# Altium PCB Inverter - Copy.PcbDoc (part 2 of 2)
Units mm, origin at the board's own origin, x right, y up, seen from the top; angles counter-clockwise.
Board outline 150 x 100 mm, 2 copper layers (Top Layer, Bottom Layer), stack 1.74 mm thick; 289 components, 202 nets, 1845 pads, 676 vias.
Unrouted connection lines stored in the file: 683.
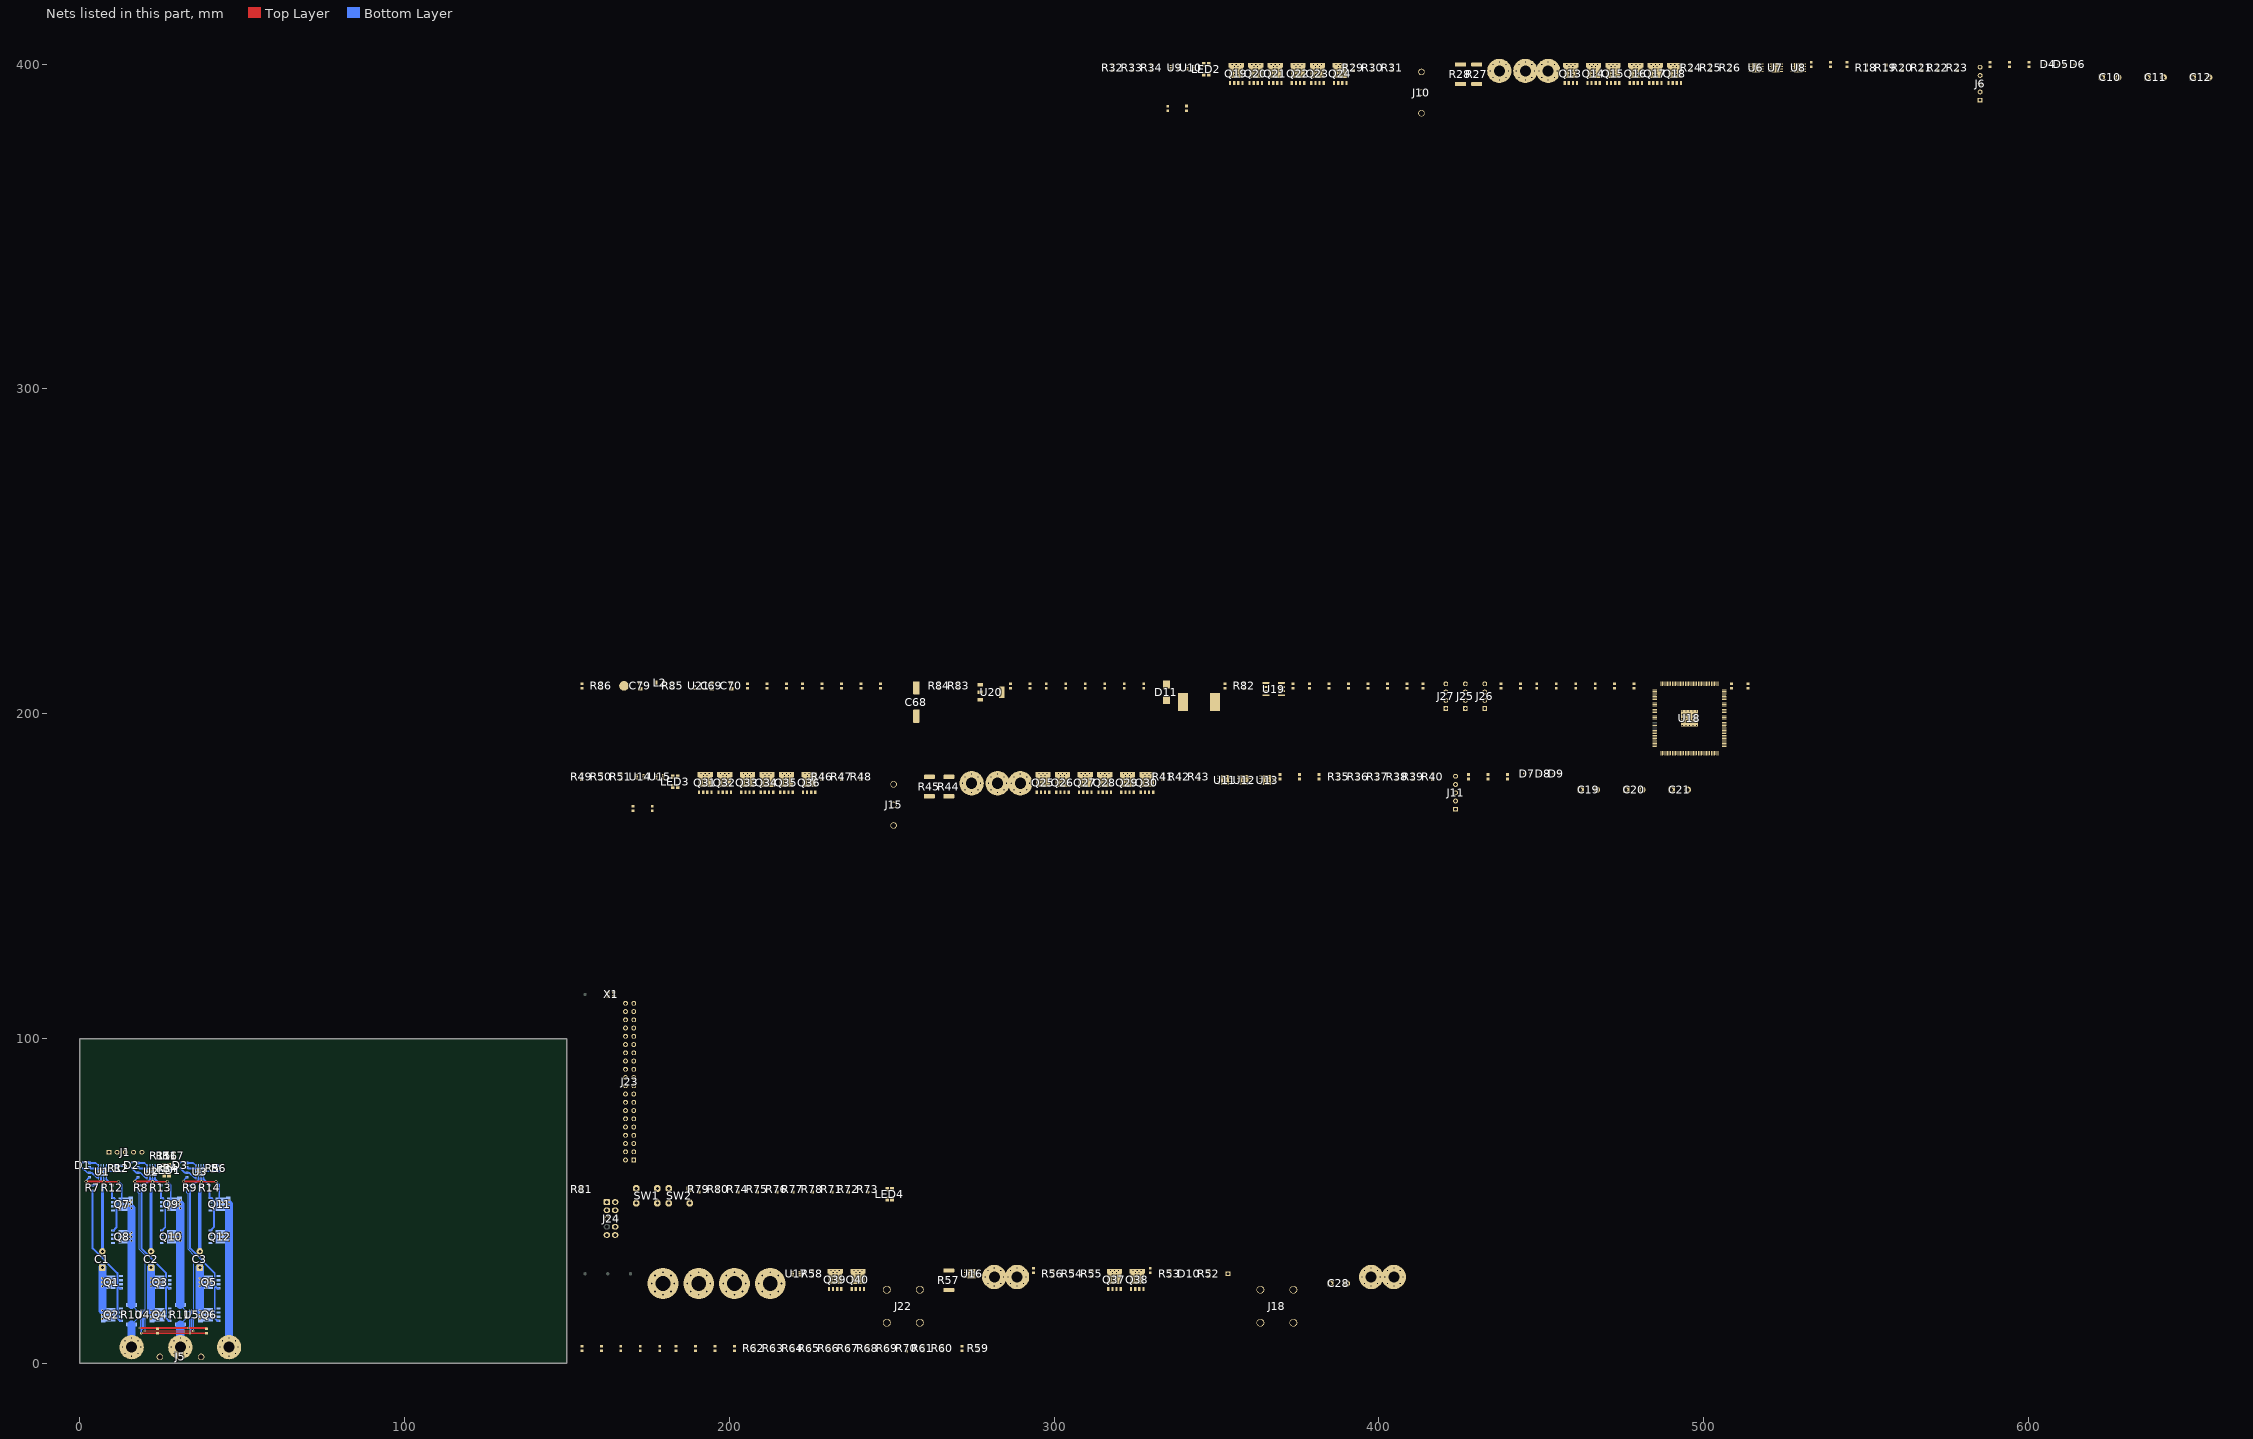
[diagram p2: the nets of this part, all layers, seen from the top]

## Part data
C1 C2 C3 C10 C11 C12 C19 C20 C21 C28: "CAP, ALU ELEC, 680UF, 35V, RAD"
C4 C5 C6 C7 C8 C9 C13 C14 C15 C16 C17 C18 C22 C23 C24 C25 C26 C27 C29 C30 C31 C41 C51 C52 C53 C54 C55 C56 C57 C58 C60 C61 C80: "CAP, MLCC, X5R, 1UF, 16V, 0603"
C32 C33 C34 C35 C36 C37 C38 C39 C40: "CAP, MLCC, C0G/NP0, 220PF, 50V, 0603"
C42 C43 C44 C45 C46 C47 C48 C49 C50 C62 C63 C64 C65 C66 C67 C71 C72 C73 C74 C75 C76 C77 C78 C81 C82 C83 C84 C85 C86: "CAP, MLCC, X7R, 100NF, 16V, 0603"
C59: "CAP, MLCC, X7R, 470PF, 50V, 0603"
C68: "CAP, ALU ELEC, 470UF, 16V, SMD"
C69 C70 C79: "CAP, MLCC, Y5V, 10UF, 0805"
D1 D2 D3 D4 D5 D6 D7 D8 D9 D10: "DIODE, SCHOTTKY, 200MA, 30V"
D11: "DIODE, SCHOTTK, RECTIF, 1A, 30V, SMB"
FID1 FID2 FID3 FID4: "1mm Fiducial with 2mm soldermask, 3mm keepout"
J1 J6 J11: "Header, 5-Pin"
J2 J3 J4 J7 J8 J9 J12 J13 J14 J16 J17 J20 J21: library part "M3 Spade Terminal", "M3 Spade Terminal"
J5 J10 J15: "TERMINAL BLOCK, WIRE TO BRD, 3POS, 10AWG"
J18 J22: "TERMINAL BLOCK, WIRE TO BRD, 2POS, 6AWG"
J23: "Header, 20-Pin, Dual row"
J24: library part CONN_HEADER_2x5P_0.100in_Male, "Header THD 10 POS Double-row 2.54mm pitch"
J25 J26 J27: "Header, 4-Pin"
L1: "INDUCTOR, 220µH, 20%, 2PINS"
L2: "FERRITE BEAD, 0.1OHM, 2A, 0805"
LED1 LED2 LED3 LED4: library part ASMB-MTB1-0A3A2, "LED, HB, RGB, 0.09W, PLCC-4"
MH1 MH2 MH3 MH4: library part MH_M4, "M4 Mounting Hole"
Q1 Q2 Q3 Q4 Q5 Q6 Q7 Q8 Q9 Q10 Q11 Q12 Q13 Q14 Q15 Q16 Q17 Q18 Q19 Q20 Q21 Q22 Q23 Q24 Q25 Q26 Q27 Q28 Q29 Q30 Q31 Q32 Q33 Q34 Q35 Q36 Q37 Q38 Q39 Q40: "MOSFET, N CH, 30V, 70A, SO-8 FL"
R1 R2 R3 R4 R5 R6 R18 R19 R20 R21 R22 R23 R35 R36 R37 R38 R39 R40 R54 R55 R83: "RESISTOR, 0603, 3K, 1%, ANTI SULFUR"
R7 R8 R9 R12 R13 R14 R24 R25 R26 R29 R30 R31 R41 R42 R43 R46 R47 R48 R56 R58 R59: "RES, THICK FILM, 1OHM, 1%, 0.1W"
R10 R11 R27 R28 R44 R45 R57: "RESISTOR, R0005, 2.0W, 1%"
R15 R16 R17 R32 R33 R34 R49 R50 R51 R62 R63 R64 R65 R66 R67 R68 R69 R70 R71 R72 R73: "RES, THICK FILM, 330 OHM, 1%, 0.1W"
R52 R60 R74 R75 R76 R79 R80 R85 R86: "Resistor, 10k, 0603"
R53 R61 R77 R78 R81 R84: "RESISTOR, CERAMIC, 1K, 0.1W, 1%"
R82: "RESISTOR, 0603, 0.1W, 1%, 0R33"
SP1: library part GroundStarPoint, "Wide star point meant for joining ground planes"
SW1 SW2: "SWITCH, SPNO, 0.05A"
U1 U2 U3 U6 U7 U8 U11 U12 U13 U16: "DRIVER, MOSFET, HALF BRIDGE, WSON-8, 1A"
U4 U5 U9 U10 U14 U15 U17: "CURRENT SENSE AMP, 50V/V, 80KHZ"
U19: "DC-DC CONV, BOOST/BUCK/INVERTING, SOIC-8"
U20: "IC, LDO, REG, 3.3V, SOT223"
U21: "LDO, FIXED, 12V, 0.1A, SOT-23-5"
X1: "OSCILLATOR, SPXO, SG-210STF, 50 MHZ, SMD"

## Via types
v1: diameter 0.7, hole 0.3, Top Layer to Bottom Layer, 525 vias
v2: diameter 0.7, hole 0.35, Top Layer to Bottom Layer, 110 vias
v3: diameter 1.27, hole 0.5, Top Layer to Bottom Layer, 32 vias
v4: diameter 1, hole 0.6, Top Layer to Bottom Layer, 9 vias

## Nets (pads, with @x,y where several pads share a name; then routed paths per layer and width w, separated by ;. In a path a pad name is that pad's centre, name@x,y a point inside that pad or via, vN(x,y) a via of type N, cw(c..) or ccw(c..) an arc to the next point about the centre after c; other vN are vias at no path point)
1.65VREF: R85.1 R86.2 U4.1 U5.1 U9.1 U10.1 U14.1 U15.1 U17.1 | length 22.9
  Top Layer w0.254: v2(20,10) v2(35,10)
  Bottom Layer w0.254: v2(20,10) 20.15,10.15 U4.1@20.15,13.875 ; v2(35,10) 35.15,10.15 U5.1@35.15,13.875
5V: C68.1 J1.1 J6.1 J11.1 J25.1 J25.2 J25.3 J25.4 L1.1 R83.1 U20.3
12V: C7.2 C8.2 C9.2 C16.2 C17.2 C18.2 C25.2 C26.2 C27.2 C30.2 C80.2 D1.A D2.A D3.A D4.A D5.A D6.A D7.A D8.A D9.A D10.A U1.1 U2.1 U3.1 U6.1 U7.1 U8.1 U11.1 U12.1 U13.1 U16.1 U21.5 | length 15.6
  Bottom Layer w0.5: D1.A@1,61.9 2.8,61.9 C7.2@3,61.7 4.995,61.7 U1.1@5.8,60.895 ; D2.A@16,61.9 17.8,61.9 C8.2@18,61.7 19.995,61.7 U2.1@20.8,60.895 ; D3.A@31,61.9 32.8,61.9 C9.2@33,61.7 34.995,61.7 U3.1@35.8,60.895
AGND: C31.1 C32.1 C33.1 C34.1 C35.1 C36.1 C37.1 C38.1 C39.1 C40.1 C41.1 C42.1 C60.1 C61.1 C62.1 C63.1 C64.1 C65.1 C66.1 C67.1 C79.1 C81.1 C82.1 C83.1 C84.1 C85.1 C86.1 R53.1 R61.1 R86.1 SP1.2 U4.2 U5.2 U9.2 U10.2 U14.2 U15.2 U17.2 U18.4 | length 29.6
  Top Layer w0.5: v2@19,9.248 24,9.248 C82.1@39,9.248
  Bottom Layer w0.5: v2(19,9.3) 19,10.336 19.5,10.836 U4.2@19.5,13.875 ; v2(34,9.3) 34,10.336 34.5,10.836 U5.2@34.5,13.875
AUX_+: J20.1 J22.1 R57.1 U17.5
  other v2: 281.6,23.8 279.62,24.62 283.58,24.62 278.8,26.6 284.4,26.6 279.62,28.58 283.58,28.58 281.6,29.4
AUX_I: R69.1 U17.6
AUX_V: R52.1 R53.2 R70.1
AVCC: C41.2 C42.2 C60.2 C61.2 C62.2 C63.2 C64.2 C65.2 C66.2 C67.2 C79.2 C81.2 C82.2 C83.2 C84.2 C85.2 C86.2 L2.1 R59.2 U4.3 U5.3 U9.3 U10.3 U14.3 U15.3 U17.3 U18.2 U18.9 U18.34 U18.35 U18.71 U18.107 U18.143 | length 26.7
  Top Layer w0.5: v2(18.5,10.9) C82.2@39,10.9
  Bottom Layer w0.5: v2(18.5,10.9) 18.848,11.248 U4.3@18.848,13.875 ; v2(33.5,10.9) 33.848,11.248 U5.3@33.848,13.873
B_PWM_H: R54.2 U16.2
B_PWM_L: R55.2 U16.3
BOOT_SEL: J23.40 U18.126
CLK_50: U18.27 X1.3
CONF_DONE: R79.1 U18.138
CRC_ERROR: R72.2 U18.134
DCBUS: C1.1 C2.1 C3.1 C10.1 C11.1 C12.1 C19.1 C20.1 C21.1 C28.1 J16.1 J18.2 Q1.D Q2.D Q3.D Q4.D Q5.D Q6.D Q13.D Q14.D Q15.D Q16.D Q17.D Q18.D Q25.D Q26.D Q27.D Q28.D Q29.D Q30.D Q37.D Q38.D R60.2 R82.2 U19.6 U21.4 | length 39.7
  Bottom Layer w2.54: v1(7,16.25) v1(7,23.75) v1(7,25) v1(7,26.25) C1.1@7,29.5 ; v1(22,16.25) v1(22,23.75) v1(22,25) v1(22,26.25) C2.1@22,29.5 ; v1(37,16.25) v1(37,23.75) v1(37,25) v1(37,26.25) C3.1@37,29.5
  other v1: 7,13.75 22,13.75 37,13.75 7.6,14.425 8.425,14.425 9.275,14.425 10.1,14.425 22.6,14.425 23.425,14.425 24.275,14.425 25.1,14.425 37.6,14.425 38.425,14.425 39.275,14.425 40.1,14.425 7,15 22,15 37,15 7.625,15.575 8.45,15.575 9.3,15.575 10.125,15.575 22.625,15.575 23.45,15.575 24.3,15.575 25.125,15.575 37.625,15.575 38.45,15.575 39.3,15.575 40.125,15.575 7.6,24.425 8.425,24.425 9.275,24.425 10.1,24.425 22.6,24.425 23.425,24.425 24.275,24.425 25.1,24.425 37.6,24.425 38.425,24.425 39.275,24.425 40.1,24.425 318.025,25.475 325.025,25.475 319.175,25.5 326.175,25.5 7.625,25.575 8.45,25.575 9.3,25.575 10.125,25.575 22.625,25.575 23.45,25.575 24.3,25.575 25.125,25.575 37.625,25.575 38.45,25.575 39.3,25.575 40.125,25.575 318.025,26.3 325.025,26.3 319.175,26.325 326.175,26.325 318.025,27.15 325.025,27.15 319.175,27.175 326.175,27.175 318.025,27.975 325.025,27.975 319.175,28 326.175,28 317.35,28.6 318.6,28.6 319.85,28.6 324.35,28.6 325.6,28.6 326.85,28.6 296.025,178.475 302.025,178.475 309.025,178.475 315.025,178.475 322.025,178.475 328.025,178.475 297.175,178.5 303.175,178.5 310.175,178.5 316.175,178.5 323.175,178.5 329.175,178.5 296.025,179.3 302.025,179.3 309.025,179.3 315.025,179.3 322.025,179.3 328.025,179.3 297.175,179.325 303.175,179.325 310.175,179.325 316.175,179.325 323.175,179.325 329.175,179.325 296.025,180.15 302.025,180.15 309.025,180.15 315.025,180.15 322.025,180.15 328.025,180.15 297.175,180.175 303.175,180.175 310.175,180.175 316.175,180.175 323.175,180.175 329.175,180.175 296.025,180.975 302.025,180.975 309.025,180.975 315.025,180.975 322.025,180.975 328.025,180.975 297.175,181 303.175,181 310.175,181 316.175,181 323.175,181 329.175,181 295.35,181.6 296.6,181.6 297.85,181.6 301.35,181.6 302.6,181.6 303.85,181.6 308.35,181.6 309.6,181.6 310.85,181.6 314.35,181.6 315.6,181.6 316.85,181.6 321.35,181.6 322.6,181.6 323.85,181.6 327.35,181.6 328.6,181.6 329.85,181.6 458.525,396.775 465.525,396.775 471.525,396.775 478.525,396.775 484.525,396.775 490.525,396.775 459.675,396.8 466.675,396.8 472.675,396.8 479.675,396.8 485.675,396.8 491.675,396.8 458.525,397.6 465.525,397.6 471.525,397.6 478.525,397.6 484.525,397.6 490.525,397.6 459.675,397.625 466.675,397.625 472.675,397.625 479.675,397.625 485.675,397.625 491.675,397.625 458.525,398.45 465.525,398.45 471.525,398.45 478.525,398.45 484.525,398.45 490.525,398.45 459.675,398.475 466.675,398.475 472.675,398.475 479.675,398.475 485.675,398.475 491.675,398.475 458.525,399.275 465.525,399.275 471.525,399.275 478.525,399.275 484.525,399.275 490.525,399.275 459.675,399.3 466.675,399.3 472.675,399.3 479.675,399.3 485.675,399.3 491.675,399.3 457.85,399.9 459.1,399.9 460.35,399.9 464.85,399.9 466.1,399.9 467.35,399.9 470.85,399.9 472.1,399.9 473.35,399.9 477.85,399.9 479.1,399.9 480.35,399.9 483.85,399.9 485.1,399.9 486.35,399.9 489.85,399.9 491.1,399.9 492.35,399.9
  other v2: 397.6,23.8 395.62,24.62 399.58,24.62 394.8,26.6 400.4,26.6 395.62,28.58 399.58,28.58 397.6,29.4
DEV_OE: J23.39 U18.122
GND: C1.2 C2.2 C3.2 C7.1 C8.1 C9.1 C10.2 C11.2 C12.2 C16.1 C17.1 C18.1 C19.2 C20.2 C21.2 C25.1 C26.1 C27.1 C28.2 C30.1 C43.1 C44.1 C45.1 C46.1 C47.1 C48.1 C49.1 C50.1 C51.1 C52.1 C53.1 C54.1 C55.1 C56.1 C57.1 C58.1 C59.1 C68.2 C69.1 C70.1 C71.1 C72.1 C73.1 C74.1 C75.1 C76.1 C77.1 C78.1 C80.1 D11.A J1.5 J6.5 J11.5 J17.1 J18.1 J21.1 J22.2 J24.2 J24.10 J27.1 J27.2 J27.3 J27.4 MH1.1 MH2.1 MH3.1 MH4.1 Q7.S Q8.S Q9.S Q10.S Q11.S Q12.S Q19.S Q20.S Q21.S Q22.S Q23.S Q24.S Q31.S Q32.S Q33.S Q34.S Q35.S Q36.S Q39.S Q40.S R1.1 R2.1 R3.1 R4.1 R5.1 R6.1 R18.1 R19.1 R20.1 R21.1 R22.1 R23.1 R35.1 R36.1 R37.1 R38.1 R39.1 R40.1 R54.1 R55.1 R81.1 R84.1 SP1.1 SW1.1 SW2.1 U1.4 U1.9 U2.4 U2.9 U3.4 U3.9 U6.4 U6.9 U7.4 U7.9 U8.4 U8.9 U11.4 U11.9 U12.4 U12.9 U13.4 U13.9 U16.4 U16.9 U18.42 U18.53 U18.63 U18.68 U18.83 U18.95 U18.104 U18.116 U18.125 U18.133 U18.137 U18.142 U18.145 U19.4 U20.1 U21.2 X1.2 | length 91.6
  Bottom Layer w0.5: C7.1@3,60.3 3.3,60 5.5,60 v1(6,59.5) ; U1.9@7,59 7.15,59.15 R1.1@11,59.15 R2.1@13,59.15 ; v1(8,59.5) 8.2,59.7 U1.4@8.2,60.895 ; C8.1@18,60.3 18.3,60 20.5,60 v1(21,59.5) ; U2.9@22.15,59.15 R3.1@26,59.15 R4.1@28,59.15 ; U2.9@23.2,59.7 U2.4@23.2,60.895 ; C9.1@33,60.3 33.3,60 35.5,60 v1(36,59.5) ; U3.9@37.15,59.15 R5.1@41,59.15 R6.1@43,59.15 ; U3.9@38.2,59.7 U3.4@38.2,60.895
  Bottom Layer w1: C1.2@7,34.5 7,54.5 ; C2.2@22,34.5 22,54.5 ; C3.2@37,34.5 37,54.5
  other v1: 274.1,26.6 275.1,26.6 274.1,27.6 275.1,27.6 274.1,28.6 275.1,28.6 6,58.5 7,58.5 8,58.5 21,58.5 22,58.5 23,58.5 36,58.5 37,58.5 38,58.5 7,59.5 22,59.5 23,59.5 37,59.5 38,59.5 352.1,178.6 353.1,178.6 358.1,178.6 359.1,178.6 365.1,178.6 366.1,178.6 352.1,179.6 353.1,179.6 358.1,179.6 359.1,179.6 365.1,179.6 366.1,179.6 352.1,180.6 353.1,180.6 358.1,180.6 359.1,180.6 365.1,180.6 366.1,180.6 493.4,196.4 494.5,196.4 495.6,196.4 496.7,196.4 497.8,196.4 493.4,197.5 494.5,197.5 495.6,197.5 496.7,197.5 497.8,197.5 493.4,198.6 494.5,198.6 495.6,198.6 496.7,198.6 497.8,198.6 493.4,199.7 494.5,199.7 495.6,199.7 496.7,199.7 497.8,199.7 493.4,200.8 494.5,200.8 495.6,200.8 496.7,200.8 497.8,200.8 515.6,397.9 516.6,397.9 521.6,397.9 522.6,397.9 528.6,397.9 529.6,397.9 515.6,398.9 516.6,398.9 521.6,398.9 522.6,398.9 528.6,398.9 529.6,398.9 515.6,399.9 516.6,399.9 521.6,399.9 522.6,399.9 528.6,399.9 529.6,399.9
  other v2: 288.6,23.8 404.6,23.8 286.62,24.62 290.58,24.62 402.62,24.62 406.58,24.62 285.8,26.6 291.4,26.6 401.8,26.6 407.4,26.6 286.62,28.58 290.58,28.58 402.62,28.58 406.58,28.58 288.6,29.4 404.6,29.4
  other v3: 179.6,21.1 190.6,21.1 201.6,21.1 212.6,21.1 177.125,22.125 182.075,22.125 188.125,22.125 193.075,22.125 199.125,22.125 204.075,22.125 210.125,22.125 215.075,22.125 176.1,24.6 183.1,24.6 187.1,24.6 194.1,24.6 198.1,24.6 205.1,24.6 209.1,24.6 216.1,24.6 177.125,27.075 182.075,27.075 188.125,27.075 193.075,27.075 199.125,27.075 204.075,27.075 210.125,27.075 215.075,27.075 179.6,28.1 190.6,28.1 201.6,28.1 212.6,28.1
GPIO1: J23.1 U18.75
GPIO2: J23.2 U18.74
GPIO3: J23.3 U18.77
GPIO4: J23.4 U18.76
GPIO5: J23.5 U18.79
GPIO6: J23.6 U18.78
GPIO7: J23.7 U18.81
GPIO8: J23.8 U18.85
GPIO9: J23.9 U18.84
GPIO10: J23.10 U18.87
GPIO11: J23.11 U18.86
GPIO12: J23.12 U18.110
GPIO13: J23.13 U18.111
GPIO14: J23.14 U18.113
GPIO15: J23.15 U18.114
GPIO16: J23.16 U18.118
GPIO17: J23.17 U18.119
GPIO18: J23.18 U18.26
GPIO19: J23.19 U18.28
GPIO20: J23.20 U18.29
GPIO21: J23.21 U18.88
GPIO22: J23.22 U18.89
GPIO23: J23.23 U18.90
GPIO24: J23.24 U18.91
GPIO25: J23.25 U18.96
GPIO26: J23.26 U18.98
GPIO27: J23.27 U18.17
GPIO28: J23.28 U18.30
GPIO29: J23.29 U18.48
GPIO30: J23.30 U18.61
GPIO31: J23.31 U18.80
GPIO32: J23.32 U18.97
GPIO33: J23.33 U18.112
GPIO34: J23.34 U18.123
GPIO35: J23.35 U18.32
GPIO36: J23.36 U18.33
GPIO37: J23.37 U18.105
GPIO38: J23.38 U18.106
JTAGEN: J24.8 R76.1 U18.15
M0_ENC_A: J1.2 U18.124
M0_ENC_B: J1.3 U18.127
M0_ENC_Z: J1.4 U18.130
M0_IA: R63.1 U4.6 U9.6 | length 40.3
  Bottom Layer w0.254: 18,55.5 18,52.573 18.373,52.2 18.373,35.119 20.15,33.342 U4.6@20.15,16.125
M0_IB: R64.1 U5.6 | length 40.3
  Bottom Layer w0.254: 33,55.5 33,52.573 33.373,52.2 33.373,35.119 35.15,33.342 U5.6@35.15,16.125
M0_LEDB: R17.2 U18.50
M0_LEDG: R16.2 U18.47
M0_LEDR: R15.2 U18.46
M0_PH_A: J2.1 J5.1 R10.1 U4.5 | length 12.6
  Bottom Layer w0.254: R10.1@16,12 19.5,15.5 U4.5@19.5,16.125
  Bottom Layer w2.54: J2.1@16,5 v2(16,7.8) R10.1@16,12
  other v2: 16,2.2 14.02,3.02 17.98,3.02 13.2,5 18.8,5 14.02,6.98 17.98,6.98
M0_PH_B: J3.1 J5.2 R11.1 U5.5 | length 12.6
  Bottom Layer w0.254: R11.1@31,12 34.5,15.5 U5.5@34.5,16.125
  Bottom Layer w2.54: J3.1@31,5 v2(31,7.8) R11.1@31,12
  other v2: 31,2.2 29.02,3.02 32.98,3.02 28.2,5 33.8,5 29.02,6.98 32.98,6.98
M0_PH_C: C6.1 J4.1 J5.3 Q5.S Q6.S Q11.D Q12.D U3.6 | length 63.7
  Top Layer w0.5: v4(32,56) v4@37.4,56 ; v4(37.5,55.9) v4@41.9,55.9
  Bottom Layer w0.5: v4@32,56.3 C6.1@33,57.3 ; v4@37.45,55.95 U3.6@37.45,57.055 ; v4(42,56) 43,55 Q11.D@43,49
  Bottom Layer w2.54: J4.1@46,5 v1(46,37.75) v1(46,39) v1(46,40.25) v1(46,47.75) v1(46,49)
  other v1: 42.875,38.425 43.7,38.425 44.55,38.425 45.375,38.425 42.9,39.575 43.725,39.575 44.575,39.575 45.4,39.575 42.875,48.425 43.7,48.425 44.55,48.425 45.375,48.425 42.9,49.575 43.725,49.575 44.575,49.575 45.4,49.575 46,50.25
  other v2: 46,2.2 44.02,3.02 47.98,3.02 43.2,5 48.8,5 44.02,6.98 47.98,6.98 46,7.8
M0_PWM_AH: R1.2 U1.2 U18.38
M0_PWM_AL: R2.2 U1.3 U18.39
M0_PWM_BH: R3.2 U2.2 U18.41
M0_PWM_BL: R4.2 U2.3 U18.43
M0_PWM_CH: R5.2 U3.2 U18.44
M0_PWM_CL: R6.2 U3.3 U18.45
M1_ENC_A: J6.2 U18.131
M1_ENC_B: J6.3 U18.132
M1_ENC_Z: J6.4 U18.135
M1_IA: R65.1
M1_IB: R66.1 U10.6
M1_LEDB: R34.2 U18.65
M1_LEDG: R33.2 U18.64
M1_LEDR: R32.2 U18.62
M1_PH_A: J7.1 J10.1 R27.1 U9.5
  other v2: 437.1,395.1 435.12,395.92 439.08,395.92 434.3,397.9 439.9,397.9 435.12,399.88 439.08,399.88 437.1,400.7
M1_PH_B: J8.1 J10.2 R28.1 U10.5
  other v2: 445.1,395.1 443.12,395.92 447.08,395.92 442.3,397.9 447.9,397.9 443.12,399.88 447.08,399.88 445.1,400.7
M1_PH_C: C15.1 J9.1 J10.3 Q17.S Q18.S Q23.D Q24.D U8.6
  other v1: 380.525,396.775 387.525,396.775 381.675,396.8 388.675,396.8 380.525,397.6 387.525,397.6 381.675,397.625 388.675,397.625 380.525,398.45 387.525,398.45 381.675,398.475 388.675,398.475 380.525,399.275 387.525,399.275 381.675,399.3 388.675,399.3 379.85,399.9 381.1,399.9 382.35,399.9 386.85,399.9 388.1,399.9 389.35,399.9
  other v2: 452.1,395.1 450.12,395.92 454.08,395.92 449.3,397.9 454.9,397.9 450.12,399.88 454.08,399.88 452.1,400.7
M1_PWM_AH: R18.2 U6.2 U18.52
M1_PWM_AL: R19.2 U6.3 U18.54
M1_PWM_BH: R20.2 U7.2 U18.55
M1_PWM_BL: R21.2 U7.3 U18.56
M1_PWM_CH: R22.2 U8.2 U18.57
M1_PWM_CL: R23.2 U8.3 U18.58
M2_ENC_A: J11.2 U18.140
M2_ENC_B: J11.3 U18.141
M2_ENC_Z: J11.4 U18.120
M2_IA: R67.1 U14.6
M2_IB: R68.1 U15.6
M2_LEDB: R51.2 U18.70
M2_LEDG: R50.2 U18.69
M2_LEDR: R49.2 U18.66
M2_PH_A: J12.1 J15.1 R44.1 U14.5
  other v2: 274.6,175.8 272.62,176.62 276.58,176.62 271.8,178.6 277.4,178.6 272.62,180.58 276.58,180.58 274.6,181.4
M2_PH_B: J13.1 J15.2 R45.1 U15.5
  other v2: 282.6,175.8 280.62,176.62 284.58,176.62 279.8,178.6 285.4,178.6 280.62,180.58 284.58,180.58 282.6,181.4
M2_PH_C: C24.1 J14.1 J15.3 Q29.S Q30.S Q35.D Q36.D U13.6
  other v1: 217.025,178.475 224.025,178.475 218.175,178.5 225.175,178.5 217.025,179.3 224.025,179.3 218.175,179.325 225.175,179.325 217.025,180.15 224.025,180.15 218.175,180.175 225.175,180.175 217.025,180.975 224.025,180.975 218.175,181 225.175,181 216.35,181.6 217.6,181.6 218.85,181.6 223.35,181.6 224.6,181.6 225.85,181.6
  other v2: 289.6,175.8 287.62,176.62 291.58,176.62 286.8,178.6 292.4,178.6 287.62,180.58 291.58,180.58 289.6,181.4
M2_PWM_AH: R35.2 U11.2 U18.92
M2_PWM_AL: R36.2 U11.3 U18.93
M2_PWM_BH: R37.2 U12.2 U18.99
M2_PWM_BL: R38.2 U12.3 U18.100
M2_PWM_CH: R39.2 U13.2 U18.101
M2_PWM_CL: R40.2 U13.3 U18.102
NCONFIG: R78.1 SW2.2 U18.129
NetC4_1: C4.1 Q1.S Q2.S Q7.D Q8.D R10.2 U1.6 U4.4 | length 53.7
  Top Layer w0.5: v4(2,56) v4@7.4,56 ; v4(7.5,55.9) 11.9,55.9 v4(12,56)
  Bottom Layer w0.254: R10.2@16,18 17.875,16.125 U4.4@18.85,16.125
  Bottom Layer w0.5: v4(2,56) 2,56.3 C4.1@3,57.3 ; U1.6@7.4,57.105 7.45,57.055 7.45,55.95 v4(7.5,55.9) ; v4(12,56) 13,55 Q7.D@13,49
  Bottom Layer w2.54: R10.2@16,18 v1(16,37.75) v1(16,39) v1(16,40.25) v1(16,47.75)
  other v1: 12.875,38.425 13.7,38.425 14.55,38.425 15.375,38.425 12.9,39.575 13.725,39.575 14.575,39.575 15.4,39.575 12.875,48.425 13.7,48.425 14.55,48.425 15.375,48.425 16,49 12.9,49.575 13.725,49.575 14.575,49.575 15.4,49.575 16,50.25
NetC4_2: C4.2 D1.K U1.8 | length 6
  Bottom Layer w0.5: D1.K@1,60.1 2.4,58.7 C4.2@3,58.7 3.75,58.7 5.345,57.105 U1.8@5.8,57.105
NetC5_1: C5.1 Q3.S Q4.S Q9.D Q10.D R11.2 U2.6 U5.4 | length 54.4
  Top Layer w0.5: v4(17,56) v4@22.4,56 ; v4(22.5,55.9) v4@26.9,55.9
  Bottom Layer w0.254: R11.2@31,18 32.875,16.125 U5.4@33.85,16.125
  Bottom Layer w0.5: v4@17,56.3 C5.1@18,57.3 ; v4@22.45,55.95 U2.6@22.45,57.055 ; v4(27,56) 28,55 Q9.D@28,49
  Bottom Layer w2.54: R11.2@31,18 v1(31,39) v1(31,40.25) v1(31,47.75) v1(31,49)
  other v1: 31,37.75 27.875,38.425 28.7,38.425 29.55,38.425 30.375,38.425 27.9,39.575 28.725,39.575 29.575,39.575 30.4,39.575 27.875,48.425 28.7,48.425 29.55,48.425 30.375,48.425 27.9,49.575 28.725,49.575 29.575,49.575 30.4,49.575 31,50.25
NetC5_2: C5.2 D2.K U2.8 | length 6
  Bottom Layer w0.5: D2.K@16,60.1 17.4,58.7 C5.2@18,58.7 18.75,58.7 20.345,57.105 U2.8@20.8,57.105
NetC6_2: C6.2 D3.K U3.8 | length 6
  Bottom Layer w0.5: D3.K@31,60.1 32.4,58.7 C6.2@33,58.7 33.75,58.7 35.345,57.105 U3.8@35.8,57.105
NetC13_1: C13.1 Q13.S Q14.S Q19.D Q20.D R27.2 U6.6 U9.4
  other v1: 355.525,396.775 361.525,396.775 356.675,396.8 362.675,396.8 355.525,397.6 361.525,397.6 356.675,397.625 362.675,397.625 355.525,398.45 361.525,398.45 356.675,398.475 362.675,398.475 355.525,399.275 361.525,399.275 356.675,399.3 362.675,399.3 354.85,399.9 356.1,399.9 357.35,399.9 360.85,399.9 362.1,399.9 363.35,399.9
NetC13_2: C13.2 D4.K U6.8
NetC14_1: C14.1 Q15.S Q16.S Q21.D Q22.D R28.2 U7.6 U10.4
  other v1: 367.525,396.775 374.525,396.775 368.675,396.8 375.675,396.8 367.525,397.6 374.525,397.6 368.675,397.625 375.675,397.625 367.525,398.45 374.525,398.45 368.675,398.475 375.675,398.475 367.525,399.275 374.525,399.275 368.675,399.3 375.675,399.3 366.85,399.9 368.1,399.9 369.35,399.9 373.85,399.9 375.1,399.9 376.35,399.9
NetC14_2: C14.2 D5.K U7.8
NetC15_2: C15.2 D6.K U8.8
NetC22_1: C22.1 Q25.S Q26.S Q31.D Q32.D R44.2 U11.6 U14.4
  other v1: 192.025,178.475 198.025,178.475 193.175,178.5 199.175,178.5 192.025,179.3 198.025,179.3 193.175,179.325 199.175,179.325 192.025,180.15 198.025,180.15 193.175,180.175 199.175,180.175 192.025,180.975 198.025,180.975 193.175,181 199.175,181 191.35,181.6 192.6,181.6 193.85,181.6 197.35,181.6 198.6,181.6 199.85,181.6
NetC22_2: C22.2 D7.K U11.8
NetC23_1: C23.1 Q27.S Q28.S Q33.D Q34.D R45.2 U12.6 U15.4
  other v1: 205.025,178.475 211.025,178.475 206.175,178.5 212.175,178.5 205.025,179.3 211.025,179.3 206.175,179.325 212.175,179.325 205.025,180.15 211.025,180.15 206.175,180.175 212.175,180.175 205.025,180.975 211.025,180.975 206.175,181 212.175,181 204.35,181.6 205.6,181.6 206.85,181.6 210.35,181.6 211.6,181.6 212.85,181.6
NetC23_2: C23.2 D8.K U12.8
NetC24_2: C24.2 D9.K U13.8
NetC29_1: C29.1 Q37.S Q38.S Q39.D Q40.D R57.2 U16.6 U17.4
  other v1: 232.025,25.475 239.025,25.475 233.175,25.5 240.175,25.5 232.025,26.3 239.025,26.3 233.175,26.325 240.175,26.325 232.025,27.15 239.025,27.15 233.175,27.175 240.175,27.175 232.025,27.975 239.025,27.975 233.175,28 240.175,28 231.35,28.6 232.6,28.6 233.85,28.6 238.35,28.6 239.6,28.6 240.85,28.6
NetC29_2: C29.2 D10.K U16.8
NetC31_2: C31.2 R59.1 U18.5
NetC32_2: C32.2 R62.2 U18.3
NetC33_2: C33.2 R63.2 U18.6
NetC34_2: C34.2 R64.2 U18.7
NetC35_2: C35.2 R65.2 U18.8
NetC36_2: C36.2 R66.2 U18.10
NetC37_2: C37.2 R67.2 U18.11
NetC38_2: C38.2 R68.2 U18.12
NetC39_2: C39.2 R69.2 U18.13
NetC40_2: C40.2 R70.2 U18.14
NetC59_2: C59.2 U19.3
NetD11_K: D11.K L1.2 U19.2
NetJ19_1: J19.1 R52.2
NetLED1_1: LED1.1 R15.1
NetLED1_2: LED1.2 R16.1
NetLED1_3: LED1.3 R17.1
NetLED2_1: LED2.1 R32.1
NetLED2_2: LED2.2 R33.1
NetLED2_3: LED2.3 R34.1
NetLED3_1: LED3.1 R49.1
NetLED3_2: LED3.2 R50.1
NetLED3_3: LED3.3 R51.1
NetLED4_1: LED4.1 R71.1
NetLED4_2: LED4.2 R72.1
NetLED4_3: LED4.3 R73.1
NetQ1_G: Q1.G Q2.G R7.1 | length 45.3
  Bottom Layer w0.6: R7.1@4,53.15 4,35.379 11.6,27.779 11.6,23.858 ; Q2.G@12.725,13.095 12.363,13.095 11.6,13.858 11.6,23.858 ; Q1.G@12.725,23.095 12.363,23.095 11.6,23.858
NetQ3_G: Q3.G Q4.G R8.1 | length 45.3
  Bottom Layer w0.6: R8.1@19,53.15 19,35.379 26.6,27.779 26.6,23.858 ; Q4.G@27.725,13.095 27.363,13.095 26.6,13.858 26.6,23.858 ; Q3.G@27.725,23.095 27.363,23.095 26.6,23.858
NetQ5_G: Q5.G Q6.G R9.1 | length 45.3
  Bottom Layer w0.6: R9.1@34,53.15 34,35.379 41.6,27.779 41.6,23.858 ; Q6.G@42.725,13.095 42.363,13.095 41.6,13.858 41.6,23.858 ; Q5.G@42.725,23.095 42.363,23.095 41.6,23.858
NetQ7_G: Q7.G Q8.G R12.1 | length 13.5
  Bottom Layer w0.6: R12.1@10,53.15 10,51.18 Q7.G@10.275,50.905 10.637,50.905 11.35,50.192 11.35,41.98 Q8.G@10.275,40.905
NetQ9_G: Q9.G Q10.G R13.1 | length 13.5
  Bottom Layer w0.6: R13.1@25,53.15 25,51.18 Q9.G@25.275,50.905 25.637,50.905 26.35,50.192 26.35,41.98 Q10.G@25.275,40.905
NetQ11_G: Q11.G Q12.G R14.1 | length 13.5
  Bottom Layer w0.6: R14.1@40,53.15 40,51.18 Q11.G@40.275,50.905 40.637,50.905 41.35,50.192 41.35,41.98 Q12.G@40.275,40.905
NetQ13_G: Q13.G Q14.G R24.1
NetQ15_G: Q15.G Q16.G R25.1
NetQ17_G: Q17.G Q18.G R26.1
NetQ19_G: Q19.G Q20.G R29.1
NetQ21_G: Q21.G Q22.G R30.1
NetQ23_G: Q23.G Q24.G R31.1
NetQ25_G: Q25.G Q26.G R41.1
NetQ27_G: Q27.G Q28.G R42.1
NetQ29_G: Q29.G Q30.G R43.1
NetQ31_G: Q31.G Q32.G R46.1
NetQ33_G: Q33.G Q34.G R47.1
NetQ35_G: Q35.G Q36.G R48.1
NetQ37_G: Q37.G Q38.G R56.1
NetQ39_G: Q39.G Q40.G R58.1
NetR7_2: R7.2 U1.7 | length 3.8
  Bottom Layer w0.6: R7.2@4,54.85 4.852,54.85 6.6,56.598 U1.7@6.6,57.105
NetR8_2: R8.2 U2.7 | length 3.8
  Bottom Layer w0.6: R8.2@19,54.85 19.852,54.85 21.6,56.598 U2.7@21.6,57.105
NetR9_2: R9.2 U3.7 | length 3.8
  Bottom Layer w0.6: R9.2@34,54.85 34.852,54.85 36.6,56.598 U3.7@36.6,57.105
NetR12_2: R12.2 U1.5 | length 3
  Bottom Layer w0.6: U1.5@8.2,57.105 8.2,56.65 R12.2@10,54.85
NetR13_2: R13.2 U2.5 | length 3
  Bottom Layer w0.6: U2.5@23.2,57.105 23.2,56.65 R13.2@25,54.85
NetR14_2: R14.2 U3.5 | length 3
  Bottom Layer w0.6: U3.5@38.2,57.105 38.2,56.65 R14.2@40,54.85
NetR24_2: R24.2 U6.7
NetR25_2: R25.2 U7.7
NetR26_2: R26.2 U8.7
NetR29_2: R29.2 U6.5
NetR30_2: R30.2 U7.5
NetR31_2: R31.2 U8.5
NetR41_2: R41.2 U11.7
NetR42_2: R42.2 U12.7
NetR43_2: R43.2 U13.7
NetR46_2: R46.2 U11.5
NetR47_2: R47.2 U12.5
NetR48_2: R48.2 U13.5
NetR56_2: R56.2 U16.7
NetR58_2: R58.2 U16.5
NetR60_1: R60.1 R61.2 R62.1
NetR82_1: R82.1 U19.1 U19.7 U19.8
NetR83_2: R83.2 R84.2 U19.5
NSTATUS: R80.1 U18.136
RESET_N: R77.1 SW1.2 U18.121
STATUSLED_B: R73.2 U18.60
STATUSLED_R: R71.2 U18.59
TCK: J24.1 R81.2 U18.18
TDI: J24.9 R75.1 U18.19
TDO: J24.3 U18.20
TMS: J24.5 R74.1 U18.16
VCC: C43.2 C44.2 C45.2 C46.2 C47.2 C48.2 C49.2 C50.2 C51.2 C52.2 C53.2 C54.2 C55.2 C56.2 C57.2 C58.2 C69.2 C70.2 C71.2 C72.2 C73.2 C74.2 C75.2 C76.2 C77.2 C78.2 J24.4 J26.1 J26.2 J26.3 J26.4 L2.2 LED1.4 LED2.4 LED3.4 LED4.4 R74.2 R75.2 R76.2 R77.2 R78.2 R79.2 R80.2 R85.2 U18.1 U18.23 U18.31 U18.36 U18.37 U18.40 U18.49 U18.51 U18.67 U18.72 U18.73 U18.82 U18.94 U18.103 U18.108 U18.109 U18.115 U18.117 U18.128 U18.139 U18.144 U20.2 U20.4 U21.3 X1.1 X1.4
pads on no net: C1.0 C2.0 C3.0 C10.0 C11.0 C12.0 C19.0 C20.0 C21.0 C28.0 C68.0 C69.0 C70.0 C79.0 D1.0 D2.0 D3.0 D4.0 D5.0 D6.0 D7.0 D8.0 D9.0 D10.0 D11.0 FID1.0 FID2.0 FID3.0 FID4.0 J24.0 J24.6 J24.7 L2.0 Q1.7 Q1.9 Q1.10 Q1.11 Q2.7 Q2.9 Q2.10 Q2.11 Q3.7 Q3.9 Q3.10 Q3.11 Q4.7 Q4.9 Q4.10 Q4.11 Q5.7 Q5.9 Q5.10 Q5.11 Q6.7 Q6.9 Q6.10 Q6.11 Q7.7 Q7.9 Q7.10 Q7.11 Q8.7 Q8.9 Q8.10 Q8.11 Q9.7 Q9.9 Q9.10 Q9.11 Q10.7 Q10.9 Q10.10 Q10.11 Q11.7 Q11.9 Q11.10 Q11.11 Q12.7 Q12.9 Q12.10 Q12.11 Q13.7 Q13.9 Q13.10 Q13.11 Q14.7 Q14.9 Q14.10 Q14.11 Q15.7 Q15.9 Q15.10 Q15.11 Q16.7 Q16.9 Q16.10 Q16.11 Q17.7 Q17.9 Q17.10 Q17.11 Q18.7 Q18.9 Q18.10 Q18.11 Q19.7 Q19.9 Q19.10 Q19.11 Q20.7 Q20.9 Q20.10 Q20.11 Q21.7 Q21.9 Q21.10 Q21.11 Q22.7 Q22.9 Q22.10 Q22.11 Q23.7 Q23.9 Q23.10 Q23.11 Q24.7 Q24.9 Q24.10 Q24.11 Q25.7 Q25.9 Q25.10 Q25.11 Q26.7 Q26.9 Q26.10 Q26.11 Q27.7 Q27.9 Q27.10 Q27.11 Q28.7 Q28.9 Q28.10 Q28.11 Q29.7 Q29.9 Q29.10 Q29.11 Q30.7 Q30.9 Q30.10 Q30.11 Q31.7 Q31.9 Q31.10 Q31.11 Q32.7 Q32.9 Q32.10 Q32.11 Q33.7 Q33.9 Q33.10 Q33.11 Q34.7 Q34.9 Q34.10 Q34.11 Q35.7 Q35.9 Q35.10 Q35.11 Q36.7 Q36.9 Q36.10 Q36.11 Q37.7 Q37.9 Q37.10 Q37.11 Q38.7 Q38.9 Q38.10 Q38.11 Q39.7 Q39.9 Q39.10 Q39.11 Q40.7 Q40.9 Q40.10 Q40.11 R1.0 R2.0 R3.0 R4.0 R5.0 R6.0 R7.0 R8.0 R9.0 R10.0 R11.0 R12.0 R13.0 R14.0 R15.0 R16.0 R17.0 R18.0 R19.0 R20.0 R21.0 R22.0 R23.0 R24.0 R25.0 R26.0 R27.0 R28.0 R29.0 R30.0 R31.0 R32.0 R33.0 R34.0 R35.0 R36.0 R37.0 R38.0 R39.0 R40.0 R41.0 R42.0 R43.0 R44.0 R45.0 R46.0 R47.0 R48.0 R49.0 R50.0 R51.0 R52.0 R53.0 R54.0 R55.0 R56.0 R57.0 R58.0 R59.0 R60.0 R61.0 R62.0 R63.0 R64.0 R65.0 R66.0 R67.0 R68.0 R69.0 R70.0 R71.0 R72.0 R73.0 R74.0 R75.0 R76.0 R77.0 R78.0 R79.0 R80.0 R81.0 R82.0 R83.0 R84.0 R85.0 R86.0 U18.21 U18.22 U18.24 U18.25 U20.0 U21.0 U21.1

## Polygon pours and split planes (outlines as drawn)
M0_PH_C on Bottom Layer "M0PHCO" (solid, pour order 30): 36,11 36,0 50.5,0 50.5,11
M0_PH_B on Bottom Layer "M0PHBO" (solid, pour order 28): 26,12.5 26,0 36,0 36,12.5
M0_PH_A on Bottom Layer "M0PHAO" (solid, pour order 26): 11.5,12.5 15.5,12.5 17,14 20.5,14 20.5,11 26,11 26,0 11.5,0
DCBUS on Bottom Layer "M0DCBUSC" (solid, pour order 22): 35.5,11.5 41.5,11.5 41.5,28.5 35.5,34.5
DCBUS on Bottom Layer "M0DCBUSA" (solid, pour order 22): 5.5,11.5 11.5,11.5 11.5,28.5 5.5,34.5
DCBUS on Bottom Layer "M0DCBUSB" (solid, pour order 22): 20.5,11.5 26.5,11.5 26.5,28.5 20.5,34.5
NetC4_1 on Bottom Layer "M0PHA" (solid, pour order 11): 11,55 18.373,55 18.373,35.229 20,33.501 20,13 11,13
GND on Bottom Layer "M0GNDA" (solid, pour order 12): 11,28.5 11,55 4,55 4,35.5
GND on Bottom Layer "M0GNDC" (solid, pour order 12): 41,28 41,55 34,55 34,35
NetC5_1 on Bottom Layer "M0PHB" (solid, pour order 11): 26,55 33.373,55 33.373,35.229 35,33.501 35,13 26,13
M0_PH_C on Bottom Layer "M0PHC" (solid, pour order 11): 41,55 50.5,55 50.5,5 48,2.5 44,2.5 41,5.5
GND on Bottom Layer "M0GNDB" (solid, pour order 12): 26,28.5 26,55 19,55 19,35.5
GND on Top Layer "BUSGND" (solid, shelved, pour order 7): 0,32 0,100 150,100 150,32
DCBUS on Top Layer "DCBUS" (solid, shelved, pour order 8): 0,32 0,11.5 150,11.5 150,32

## Text inside footprints (layer, text, board x,y; h text height)
J23: Top Overlay "1" at 171.108,60.06 h1.27 r90; Top Overlay "2" at 168.568,60.06 h1.27 r90; Top Overlay "40" at 168.568,112.892 h1.27 r90; Top Overlay "39" at 171.108,112.892 h1.27 r90
J24: Top Overlay "2" at 167.918,49.426 h0.76 r90; Top Overlay "1" at 159.663,49.771 h0.76 r270; Top Overlay "10" at 167.918,39.005 h0.76 r90; Top Overlay "9" at 159.663,40.053 h0.76 r270